# Altium PCB Callisto Control Board.PcbDoc
Units mm, origin at the board's own origin, x right, y up, seen from the top; angles counter-clockwise.
Board outline 126 x 70.5 mm, 4 copper layers (Top Layer, Layer 1, Layer 2, Bottom Layer), stack 1.767 mm thick; 72 components, 54 nets, 282 pads, 29 vias.
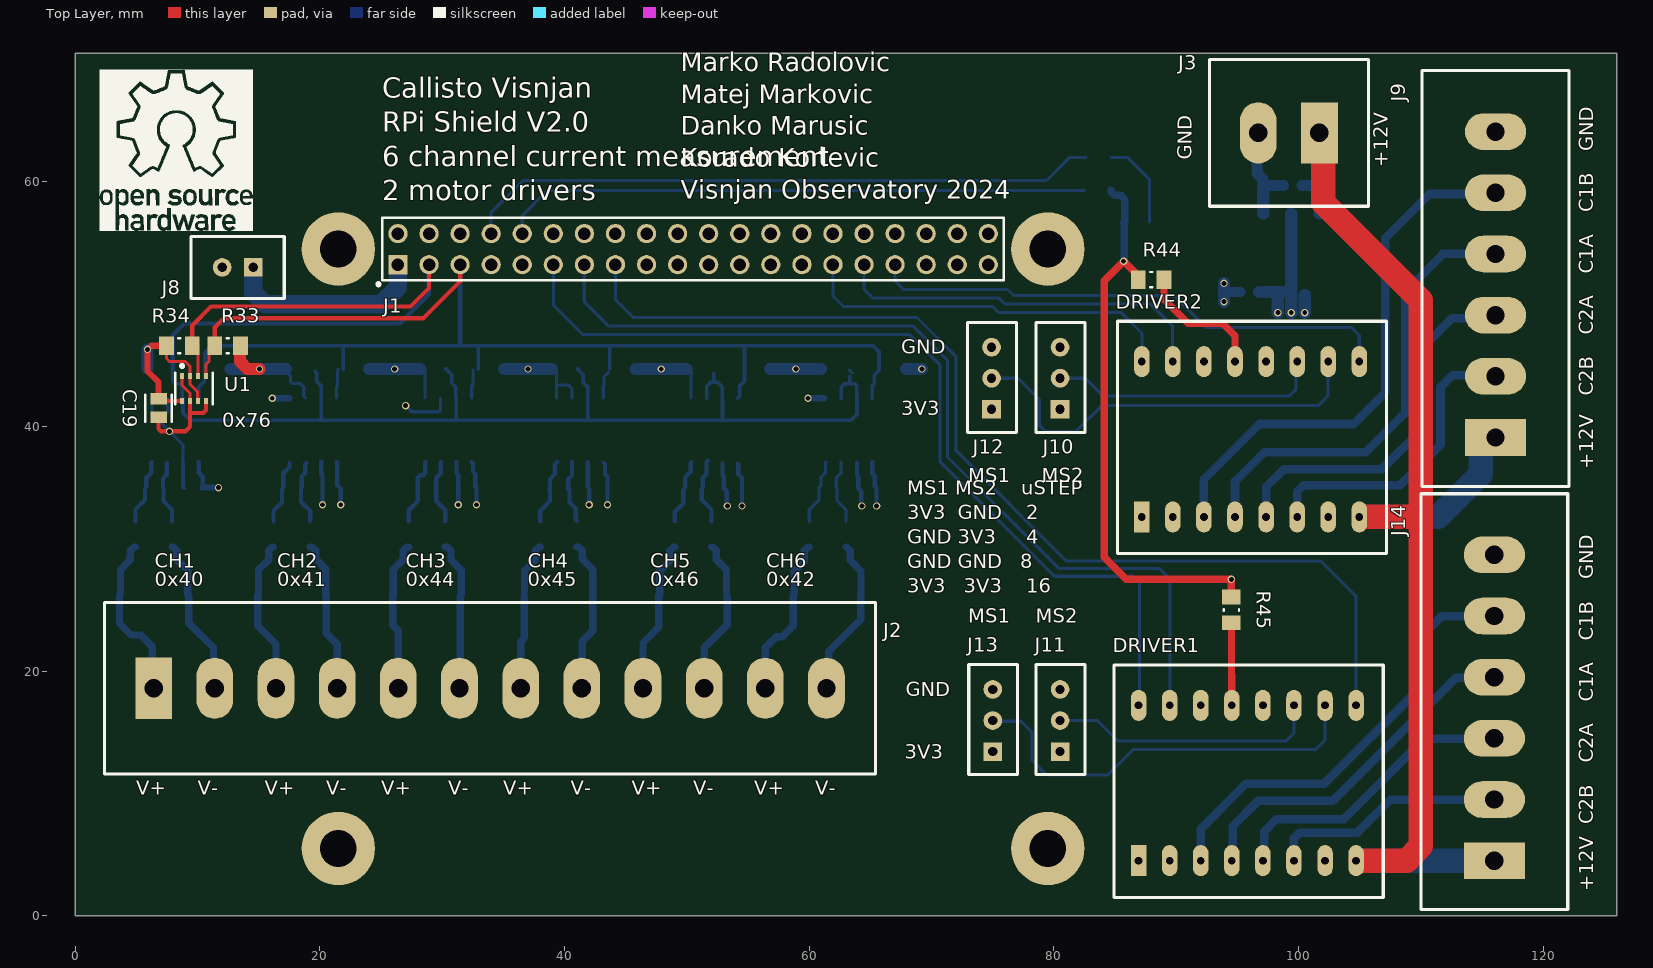
[diagram p0: Top Layer view]
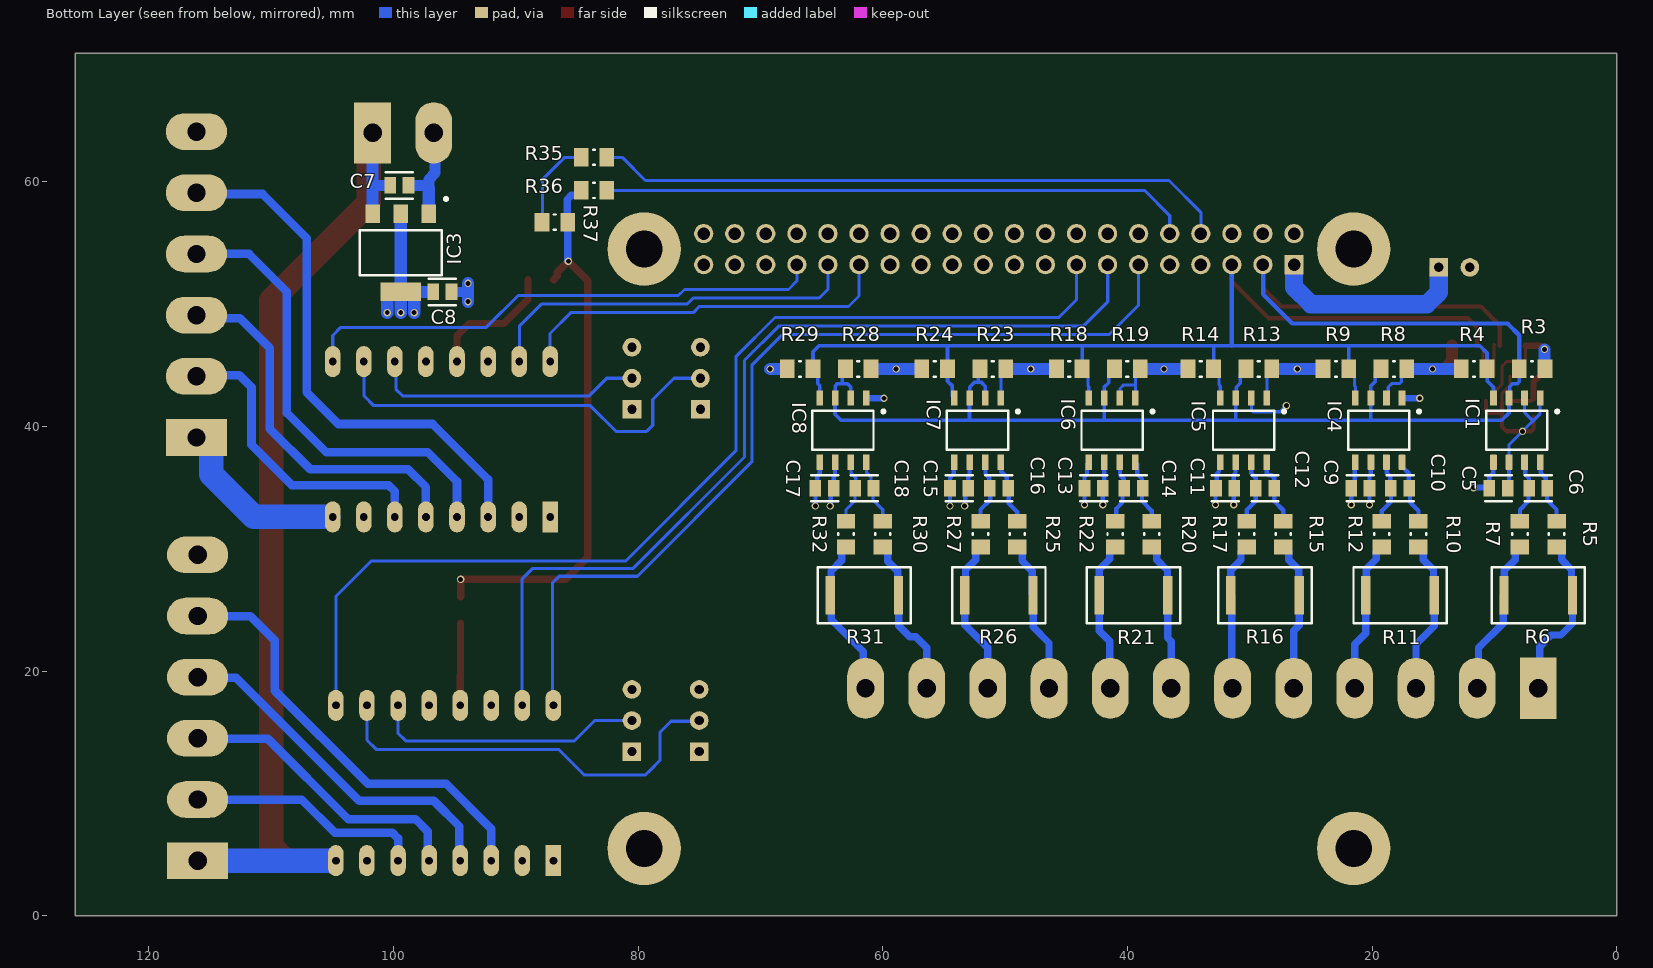
[diagram p1: Bottom Layer view, seen from below]
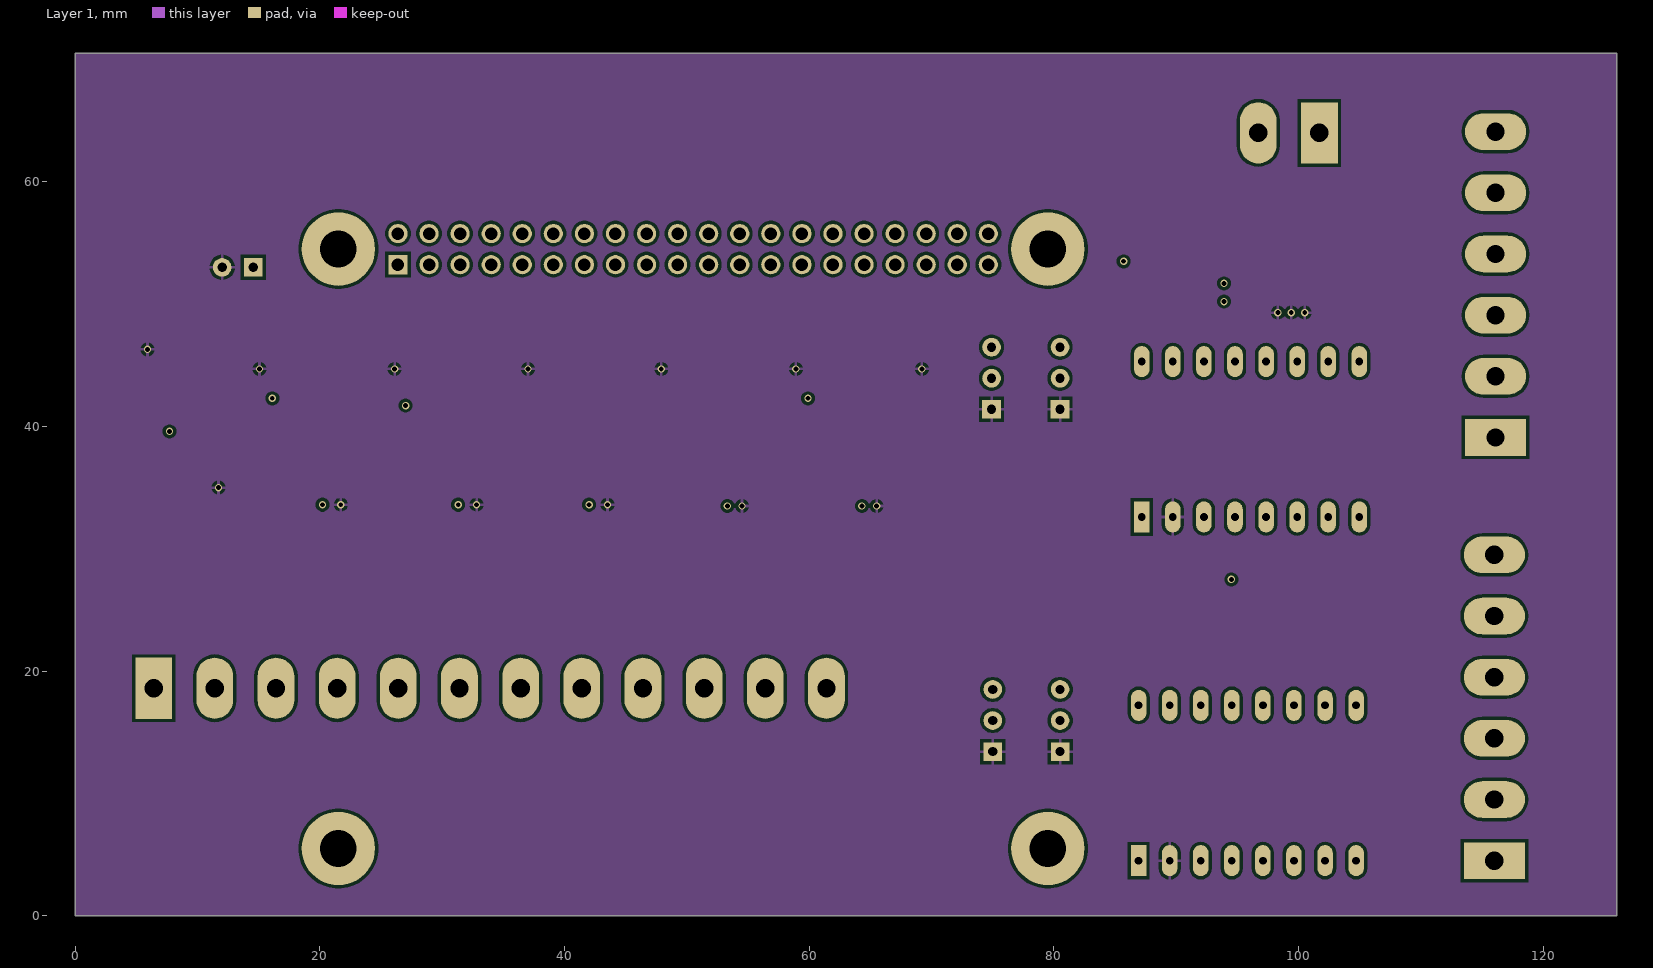
[diagram p2: Layer 1]
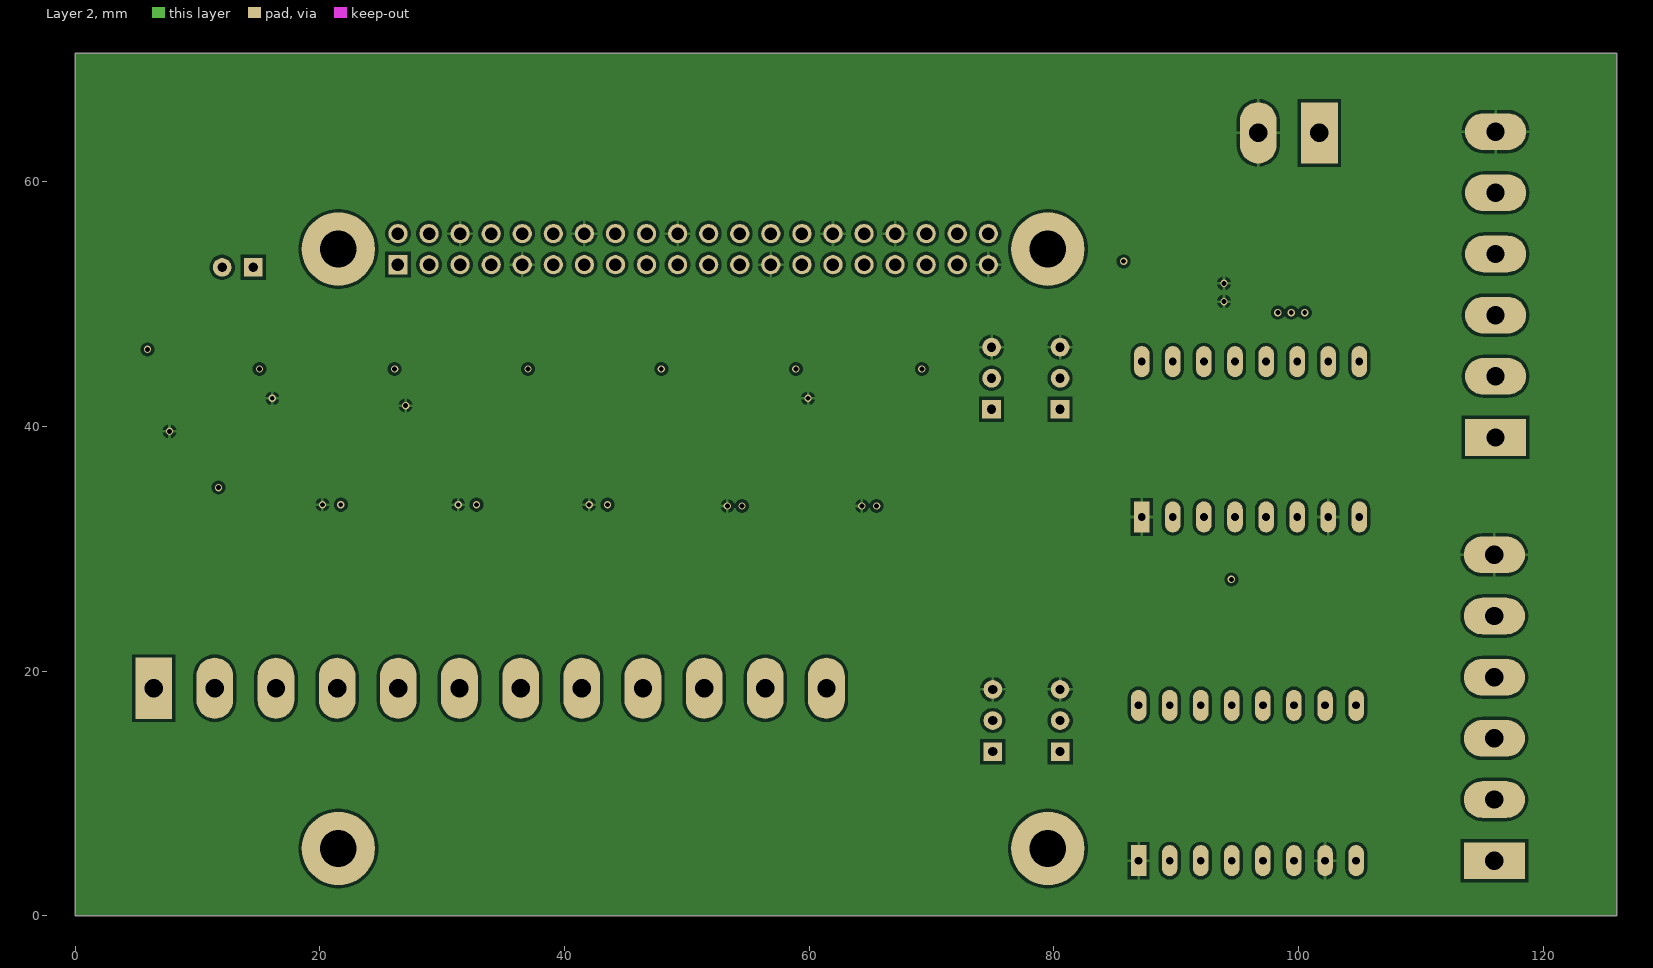
[diagram p3: Layer 2]
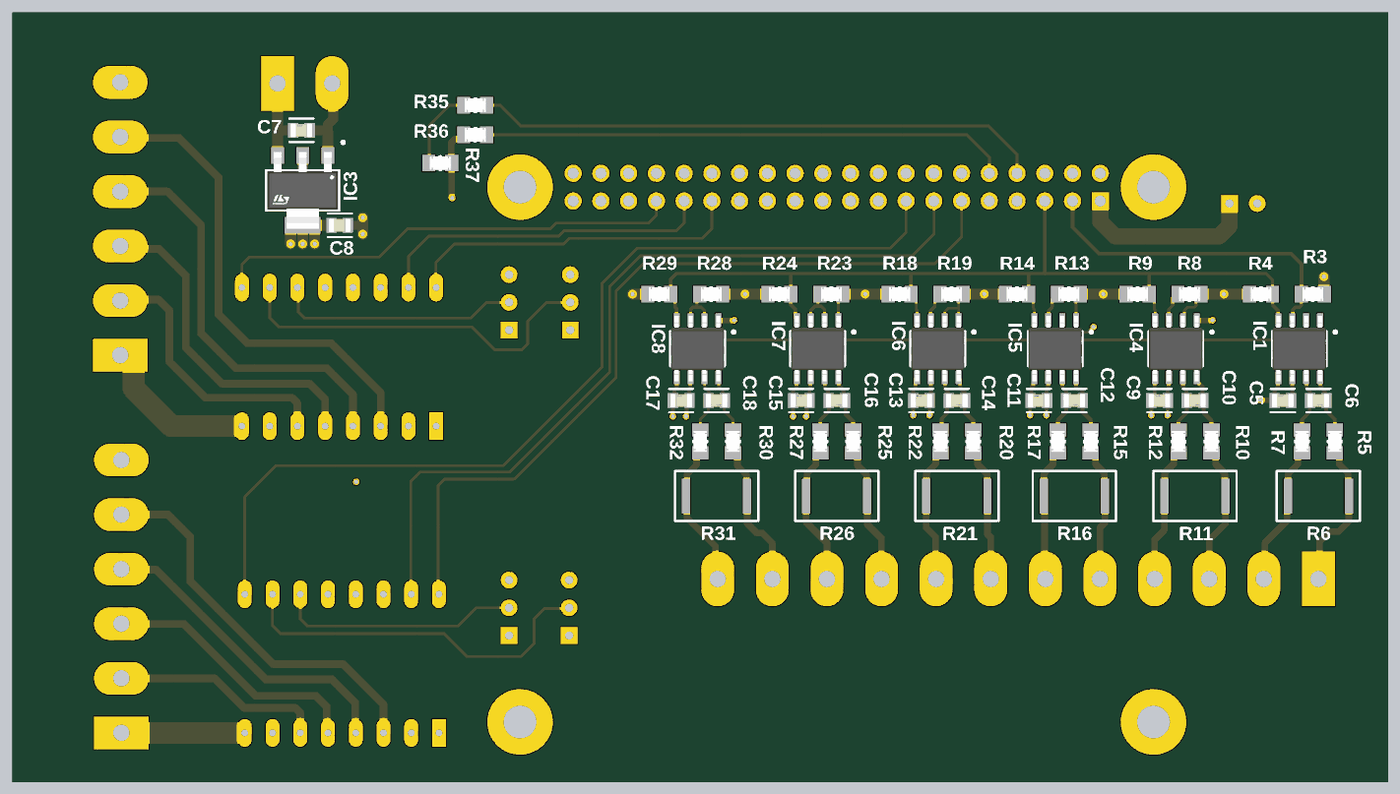
[diagram p4: 3D render of the assembled board from below, using the file's embedded part models]

## Layer stack, top to bottom
Top Solder: solder mask 0.0203, Solder Resist, Dk 3.5
Top Layer: signal copper 0.0533
Dielectric 2: prepreg 0.0711, PP-006, Dk 4.1
Layer 1: signal copper 0.035
Dielectric 1: dielectric 1.4478, FR-4, Dk 4.6
Layer 2: signal copper 0.035
Dielectric 3: prepreg 0.0711, PP-006, Dk 4.1
Bottom Layer: signal copper 0.0533
Bottom Solder: solder mask 0.0203, Solder Resist, Dk 3.5

## Board outline
0,0 0,70.5 126,70.5 126,0

## Design rules (kind name [scope] priority, off if disabled: settings)
Clearance [All] p1: gap=0.254 ignorepadtopadclearanceinfootprint=FALSE except(0: Arc-Hole Track-Hole SMDPad-Hole THPad-Hole Via-Hole Fill-Hole Poly-Hole Region-Hole Text-Hole)
HoleSize [All] p1: absolutevalues=TRUE maxlimit=4 minlimit=0.15 maxpercent=80.000 minpercent=20.000
PolygonConnect [All] p1: connectstyle=Relief reliefconductorwidth=0.254 reliefentries=4 polygonreliefangle="90 Angle" airgapwidth=0.254
RoutingVias [All] p1: holewidth=0.711 width=1.27 viastyle="Through Hole" minholewidth=0.15 minwidth=0.25 maxholewidth=5 maxwidth=6
SolderMaskExpansion [All] p1: expansion=0.102 istentingtop=FALSE
Width [All] p1: maxlimit=2 minlimit=0.254 preferedwidth=0.6
29 further rules are at their usual default settings.

## Classes and differential pairs
component class "Callisto Control Board": J2 R37
component class TMC2209: DRIVER1 DRIVER2 J9 J10 J11 J12 J13 J14 R44 R45
component class "Temperature sensor": C19 R33 R34 U1
component class "Raspberry Pi": J1 J8 R35 R36
component class INA219: C17 C18 IC8 R28 R29 R30 R31 R32
component class "3V3 Low Dropout Regulator": C7 C8 IC3 J3

## Components (designator, comment, footprint, x,y, rotation, side; value= is the part's Value field where it differs from the comment)
C5 "0.1 uF" FP-C0805C-DN-MFG 9.66,34.949 r180 bottom value="0.10 μF"
C6 "0.1 uF" FP-C0805C-DN-MFG 6.41,34.949 r0 bottom value="0.10 μF"
C7 "0.1 μF" FP-C0805C-DN-MFG 99.511,59.703 r180 bottom
C8 "10 uF" FP-C0805C-DG-MFG 96,51 r180 bottom
C9 "0.1 uF" FP-C0805C-DN-MFG 20.955,34.949 r180 bottom value="0.10 μF"
C10 "0.1 uF" FP-C0805C-DN-MFG 17.705,34.949 r0 bottom value="0.10 μF"
C11 "0.1 uF" FP-C0805C-DN-MFG 32,34.949 r180 bottom value="0.10 μF"
C12 "0.1 uF" FP-C0805C-DN-MFG 28.75,34.949 r0 bottom value="0.10 μF"
C13 "0.1 uF" FP-C0805C-DN-MFG 42.75,34.949 r180 bottom value="0.10 μF"
C14 "0.1 uF" FP-C0805C-DN-MFG 39.5,34.949 r0 bottom value="0.10 μF"
C15 "0.1 uF" FP-C0805C-DN-MFG 53.75,34.949 r180 bottom value="0.10 μF"
C16 "0.1 uF" FP-C0805C-DN-MFG 50.5,34.949 r0 bottom value="0.10 μF"
C17 "0.1 uF" FP-C0805C-DN-MFG 64.75,34.949 r180 bottom value="0.10 μF"
C18 "0.1 uF" FP-C0805C-DN-MFG 61.5,34.949 r0 bottom value="0.10 μF"
C19 "0.1 μF" FP-C0805C-DN-MFG 6.8,41.5 r270 top
DRIVER1 "TMC2209" TMC2209 86.92,4.5 r90 top
DRIVER2 "TMC2209" TMC2209 87.18,32.6 r90 top
IC1 "INA219AIDR" INA219AIDR 8.16,39.699 r270 bottom
IC3 "LD1117S33CTR" LD1117 99.4,54.2 r270 bottom
IC4 "INA219AIDR" INA219AIDR 19.455,39.699 r270 bottom
IC5 "INA219AIDR" INA219AIDR 30.5,39.699 r270 bottom
IC6 "INA219AIDR" INA219AIDR 41.25,39.699 r270 bottom
IC7 "INA219AIDR" INA219AIDR 52.25,39.699 r270 bottom
IC8 "INA219AIDR" INA219AIDR 63.25,39.699 r270 bottom
J1 "PRT-16763" FP-SFH11-PBPC-D20-ST-BK-MFG 26.375,53.225 r0 top
J2 "12 pin header" "12 PIN TERMINAL" 6.4,18.6 r0 top
J3 "2 pin" "2 PIN TERMINAL 5MM" 101.7,64 r180 top
J8 "2 pin" "2 PIN HEADER" 14.54,53 r180 top
J9 "6 pin" "6 PIN TERMINAL 5 MM" 116.1,39.1 r90 top
J10 "3 pin" "3 PIN HEADER" 80.5,41.4 r90 top
J11 "3 pin" "3 PIN HEADER" 80.5,13.42 r90 top
J12 "3 pin" "3 PIN HEADER" 74.9,41.4 r90 top
J13 "3 pin" "3 PIN HEADER" 75,13.42 r90 top
J14 "6 pin" "6 PIN TERMINAL 5 MM" 116,4.5 r90 top
R3 "3k3" "0805 RESISTOR - IPC A" 6.91,44.699 r180 bottom
R4 "3k3" "0805 RESISTOR - IPC A" 11.66,44.699 r0 bottom
R5 "10R" "0805 RESISTOR - IPC A" 4.91,31.199 r270 bottom
R6 "100 mΩ" PE2512FKM070R1L 6.41,26.199 r180 bottom
R7 "10R" "0805 RESISTOR - IPC A" 7.91,31.199 r270 bottom
R8 "3k3" "0805 RESISTOR - IPC A" 18.205,44.699 r180 bottom
R9 "3k3" "0805 RESISTOR - IPC A" 22.955,44.699 r0 bottom
R10 "10R" "0805 RESISTOR - IPC A" 16.205,31.199 r270 bottom
R11 "100 mΩ" PE2512FKM070R1L 17.705,26.199 r180 bottom
R12 "10R" "0805 RESISTOR - IPC A" 19.205,31.199 r270 bottom
R13 "3k3" "0805 RESISTOR - IPC A" 29.25,44.699 r180 bottom
R14 "3k3" "0805 RESISTOR - IPC A" 34,44.699 r0 bottom
R15 "10R" "0805 RESISTOR - IPC A" 27.25,31.199 r270 bottom
R16 "100 mΩ" PE2512FKM070R1L 28.75,26.199 r180 bottom
R17 "10R" "0805 RESISTOR - IPC A" 30.25,31.199 r270 bottom
R18 "3k3" "0805 RESISTOR - IPC A" 40,44.699 r180 bottom
R19 "3k3" "0805 RESISTOR - IPC A" 44.75,44.699 r0 bottom
R20 "10R" "0805 RESISTOR - IPC A" 38,31.199 r270 bottom
R21 "100 mΩ" PE2512FKM070R1L 39.5,26.199 r180 bottom
R22 "10R" "0805 RESISTOR - IPC A" 41,31.199 r270 bottom
R23 "3k3" "0805 RESISTOR - IPC A" 51,44.699 r180 bottom
R24 "3k3" "0805 RESISTOR - IPC A" 55.75,44.699 r0 bottom
R25 "10R" "0805 RESISTOR - IPC A" 49,31.199 r270 bottom
R26 "100 mΩ" PE2512FKM070R1L 50.5,26.199 r180 bottom
R27 "10R" "0805 RESISTOR - IPC A" 52,31.199 r270 bottom
R28 "3k3" "0805 RESISTOR - IPC A" 62,44.699 r180 bottom
R29 "3k3" "0805 RESISTOR - IPC A" 66.75,44.699 r0 bottom
R30 "10R" "0805 RESISTOR - IPC A" 60,31.199 r270 bottom
R31 "100 mΩ" PE2512FKM070R1L 61.5,26.199 r180 bottom
R32 "10R" "0805 RESISTOR - IPC A" 63,31.199 r270 bottom
R33 "4k7" "0805 RESISTOR - IPC A" 12.451,46.6 r180 top
R34 "4k7" "0805 RESISTOR - IPC A" 8.5,46.6 r0 top
R35 "0R" "0805 RESISTOR - IPC A" 83.6,62 r0 bottom
R36 "0R" "0805 RESISTOR - IPC A" 83.6,59.3 r0 bottom
R37 "1k" "0805 RESISTOR - IPC A" 86.8,56.7 r0 bottom
R44 "0R" "0805 RESISTOR - IPC A" 87.949,52 r180 top
R45 "0R" "0805 RESISTOR - IPC A" 94.5,25 r90 top
U1 "BME280" FP-BME280-MFG 9.7,43.1 r90 top

## Footprints (in the part's own frame and the unit in brackets; to place one, negate y for a bottom-side part, rotate by r counter-clockwise, add the part's x,y. Pads: shape width x height; smd on the part's side, far side on the other; paste and mask are expansions set on the pad)
"2 PIN HEADER" [mil]
  rect 60x60 hole 30: 1(0,0)
  round 60 hole 30: 2(100,0)
  silkscreen extent -100,-100 200,100
"2 PIN TERMINAL 5MM" [mm]
  rect 3x5 hole 1.5: 1(0,0)
  oval 3x5 hole 1.5: 2(5,0)
  silkscreen extent -4,-6 9,6
"3 PIN HEADER" [mil]
  rect 60x60 hole 30: 1(0,0)
  round 60 hole 30: 2(100,0) 3(200,0)
  silkscreen extent -74,-80 280,77
"6 PIN TERMINAL 5 MM" [mm] "6 pin terminal block 5 mm"
  rect 3x5 hole 1.5: 1(0,0)
  oval 3x5 hole 1.5: 2(5,0) 3(10,0) 4(15,0) 5(20,0) 6(25,0)
  silkscreen extent -4,-6 30,6
"12 PIN TERMINAL" [mm]
  rect 3x5 hole 1.5: 1(0,0)
  oval 3x5 hole 1.5: 2(5,0) 3(10,0) 4(15,0) 5(20,0) 6(25,0) 7(30,0) 8(35,0) 9(40,0) 10(45,0) 11(50,0) 12(55,0)
  silkscreen extent -4,-7 59,7
"0805 RESISTOR - IPC A" [mil]
  rect 47.5x59.38 smd paste+0: 1(-41.37,0) 2(41.37,0)
  silkscreen extent -3,-25 3,25, body extent -39,-25 39,25, height 20
FP-BME280-MFG [mm]
  rect 0.5x0.35 smd paste+0 mask+0: 1(1.025,0.975) 2(1.025,0.325) 3(1.025,-0.325) 4(1.025,-0.975) 5(-1.025,-0.975) 6(-1.025,-0.325) 7(-1.025,0.325) 8(-1.025,0.975)
  silkscreen extent -1.3,-1.55 1.97,1.55
FP-C0805C-DG-MFG [mm]
  rect 0.95x1.35 smd paste+0 mask+0: 1(-0.75,0) 2(0.75,0)
  silkscreen extent -1.11,-1.08 1.1,1.07, body extent -1,-0.63 1,0.63, height 1.4
FP-C0805C-DN-MFG [mm]
  rect 0.95x1.35 smd paste+0 mask+0: 1(-0.75,0) 2(0.75,0)
  silkscreen extent -1.1,-1.07 1.1,1.07, body extent -1,-0.63 1,0.63, height 0.88
FP-SFH11-PBPC-D20-ST-BK-MFG [mm]
  rect 1.57x1.57 hole 1.02 paste-2539.97: 1(0,0)
  round 1.57 hole 1.02 paste-2539.97: 2(0,2.54) 3(2.54,0) 4(2.54,2.54) 5(5.08,0) 6(5.08,2.54) 7(7.62,0) 8(7.62,2.54) 9(10.16,0) 10(10.16,2.54) 11(12.7,0) 12(12.7,2.54) 13(15.24,0) 14(15.24,2.54) 15(17.78,0) 16(17.78,2.54) 17(20.32,0) 18(20.32,2.54) 19(22.86,0) 20(22.86,2.54) 21(25.4,0) 22(25.4,2.54) 23(27.94,0) 24(27.94,2.54) 25(30.48,0) 26(30.48,2.54) 27(33.02,0) 28(33.02,2.54) 29(35.56,0) 30(35.56,2.54) 31(38.1,0) 32(38.1,2.54) 33(40.64,0) 34(40.64,2.54) 35(43.18,0) 36(43.18,2.54) 37(45.72,0) 38(45.72,2.54) 39(48.26,0) 40(48.26,2.54)
  silkscreen extent -1.72,-1.72 49.53,3.82
INA219AIDR [mm] "SOIC, 8-Leads, Body 5x4mm, Pitch 1.27mm, IPC High Density"
  rrect18% 1.25x0.55 smd: 1(-2.625,1.905) 2(-2.625,0.635) 3(-2.625,-0.635) 4(-2.625,-1.905) 5(2.625,-1.905) 6(2.625,-0.635) 7(2.625,0.635) 8(2.625,1.905)
  silkscreen extent -1.65,-2.5 1.6,3.43, body extent -3,-2.45 3,2.45, height 1.63
LD1117 [mm]
  rect 1.5x1.2 smd paste+0: 1(-3.2,2.3) 2(-3.2,0) 3(-3.2,-2.3)
  rect 1.5x3.3 smd paste+0: 4(3.2,0)
  silkscreen extent -4.52,-3.35 1.85,3.82, body extent -3.5,-3.25 3.5,3.25, height 1.9
PE2512FKM070R1L [mm]
  rect 0.76x3.18 smd: 1(-2.795,0) 2(2.795,0)
  silkscreen extent -3.81,-2.29 3.81,2.29
TMC2209 [mm]
  rect 2.54x1.27 hole 0.635: 1(0,0)
  oval 2.54x1.27 hole 0.635: 2(0,-2.54) 3(0,-5.08) 4(0,-7.62) 5(0,-10.16) 6(0,-12.7) 7(0,-15.24) 8(0,-17.78) 9(12.7,-17.78) 10(12.7,-15.24) 11(12.7,-12.7) 12(12.7,-10.16) 13(12.7,-7.62) 14(12.7,-5.08) 15(12.7,-2.54) 16(12.7,0)
  round 1 on Top Overlay: ""(-2,3)
  silkscreen extent -3,-20 16,2

## Part data
C5 C6 C9 C10 C11 C12 C13 C14 C15 C16 C17 C18: library part CMP-03020-002581-2, "C0805 0.10 μF X7R 30ppm/°C 20.00% 50 V C0805C104M5RAC", Capacitance="0.10 μF", Manufacturer=KEMET, Manufacturer Part Number=C0805C104M5RAC, Package=C0805C-DN, Temperature="-55°C to +125°C", Temperature Characteristic=X7R, Temperature Coefficient=30ppm/°C, Temperature Range High=+125°C, Temperature Range Low=-55°C, Tolerance=0.2, Voltage Rating="50 V", Automotive=No, Category=Cap, ComponentLink2Description=Datasheet, ComponentLink2URL=https://content.kemet.com/datasheets/KEM_C1003_C0G_SMD.pdf, Device Class L1="Passive Components", Device Class L2=Capacitors, Device Class L3="Ceramic Capacitors", Height=0.88mm, Ipc Land Pattern Name=CAPC200125X78, Lead Free=Yes, Material=Ceramic, Mouser Description="Multilayer Ceramic Capacitors MLCC - SMD/SMT 50volts 0.1uF 20% X7R", Octopart=https://octopart.com/c0805c104m5rac-kemet-2226142, RoHS=TRUE
C7 C19: library part CMP-03020-002581-2, "C0805 0.10 μF X7R 30ppm/°C 20.00% 50 V C0805C104M5RAC", Manufacturer=KEMET, Manufacturer Part Number=C0805C104M5RAC, Package=C0805C-DN, Temperature="-55°C to +125°C", Temperature Characteristic=X7R, Temperature Coefficient=30ppm/°C, Temperature Range High=+125°C, Temperature Range Low=-55°C, Tolerance=0.2, Voltage Rating="50 V", Automotive=No, Capacitance="0.1 μF", Category=Cap, ComponentLink2Description=Datasheet, ComponentLink2URL=https://content.kemet.com/datasheets/KEM_C1003_C0G_SMD.pdf, Device Class L1="Passive Components", Device Class L2=Capacitors, Device Class L3="Ceramic Capacitors", Height=0.88mm, Ipc Land Pattern Name=CAPC200125X78, Lead Free=Yes, Material=Ceramic, Mouser Description="Multilayer Ceramic Capacitors MLCC - SMD/SMT 50volts 0.1uF 20% X7R", Octopart=https://octopart.com/c0805c104m5rac-kemet-2226142, RoHS=TRUE
C8: library part CMP-2007-03243-2, "CAP CER 10UF 10V X5R 0805 / C0805C106K8PACTU", 3DS Part Number=220-00001, Manufacturer=Kemet, Manufacturer Part Number=C0805C106K8PACTU, Package=C0805C-DG, Temperature="-55°C to +85°C", Temperature Characteristic=X5R, Temperature Coefficient=15%, Temperature Range High=+85°C, Temperature Range Low=-55°C, Tolerance=10%, Voltage=10V, Automotive=No, Capacitance="10 uF", Category=Cap, ComponentLink2Description=Datasheet, ComponentLink2URL=https://content.kemet.com/datasheets/KEM_C1006_X5R_SMD.pdf, Device Class L1="Passive Components", Device Class L2=Capacitors, Device Class L3="Ceramic Capacitors", Digikey Description="CAP CER 10UF 10V X5R 0805", Height=1.4mm, Ipc Land Pattern Name=CAPC200125X125, Lead Free=Yes, Material=Ceramic, Mouser Description="CAP CER 10UF 10V X5R 0805", Octopart=https://octopart.com/c0805c106k8pactu-kemet-98697, RoHS=TRUE, Voltage Rating=10V
DRIVER1 DRIVER2: "TMC2209 FET based stepper motor driver board"
IC1 IC4 IC5 IC6 IC7 IC8: "Current & Power Monitors & Regulators Zero-Drift,Bi-Dir Crnt/Pwr Monitor"
IC3: "IC REG LINEAR 3.3V 800MA SOT223"
J1: library part "Raspberry Pi 3+ Header", "Headers & Wire Housings Extended GPIO Female Header - 2x20 Pin (16mm/7.30mm)"
J2: library part "12 pin terminal"
J3: library part "2 pin terminal block 5 mm"
J8: library part "2 pin male header 0.254mm"
J9 J14: library part "6 pin terminal block 5 mm"
J10 J11 J12 J13: library part "3 pin male header 0.254mm"
R3 R4 R8 R9 R13 R14 R18 R19 R23 R24 R28 R29: library part RE0805FRE073K3L, "Thick Film Resistors - SMD 3.3 kOhms 125 mW 0805 1% / RE0805FRE073K3L"
R5 R7 R10 R12 R15 R17 R20 R22 R25 R27 R30 R32: library part RC0805FR-0710RL, "Thick Film Resistors - SMD 10 Ohms 125 mW 0805 1% / RC0805FR-0710RL"
R6 R11 R16 R21 R26 R31: library part PE2512FKM070R1L, "Current Sense Resistors - SMD 100 mOhms 1 Watt 1 % 75 ppm/C AEC-Q200 / PE2512FKM070R1L"
R33 R34: library part RC0805FR-104K7L, "Thick Film Resistors - SMD 4.7 kOhms 250 mW 0805 1% / RC0805FR-104K7L"
R35 R36 R44 R45: library part RC0805JR-070RL, "Thick Film Resistors - SMD 0 Ohms 125 mW 0805 5% / RC0805JR-070RL"
R37: library part RC0805FR-071KL, "Thick Film Resistors - SMD 1 kOhms 125 mW 0805 1% / RC0805FR-071KL", Part Number=RC0805FR-071KL
U1: library part CMP-2000-05073-3, "SENSOR PRESSURE HUMIDITY TEMP", Case/Package=LGA, Max Operating Temperature=85°C, Min Operating Temperature=-40°C, Accuracy=3%, Lead Free="Lead Free", Mount="Surface Mount", Number of Pins=8, Output Type=SPI, Packaging="Cut Tape", Response Time=1s, Sensor Type=Temperature

## Free pads (board coordinates)
  round 6 hole 3: 8(21.5,5.5) 8(21.5,54.5) 8(79.5,5.5) 8(79.5,54.5)

## Via types
v1: diameter 0.6, hole 0.4, Top Layer to Bottom Layer, 29 vias

## Nets (pads, with @x,y where several pads share a name; then routed paths per layer and width w, separated by ;. In a path a pad name is that pad's centre, name@x,y a point inside that pad or via, vN(x,y) a via of type N, cw(c..) or ccw(c..) an arc to the next point about the centre after c; other vN are vias at no path point)
+3V3_LDO: C5.1 C8.1 C9.1 C11.1 C13.1 C15.1 C17.1 C19.1 DRIVER1.2 DRIVER2.2 IC1.5 IC3.2 IC3.4 IC4.2 IC4.5 IC5.1 IC5.5 IC6.1 IC6.2 IC6.5 IC7.1 IC7.5 IC8.5 J8.2 J10.1 J11.1 J12.1 J13.1 R3.2 R4.2 R8.2 R9.2 R13.2 R14.2 R18.2 R19.2 R23.2 R24.2 R28.2 R29.2 R33.1 R34.1 U1.2 U1.6 U1.8 | length 88.9
  Top Layer w0.254: C19.1 6.975,42.075 7.125,42.075 C19.1@7.1,42.1 ; R34.1 7.449,45.551 7.7,45.3 9,45.3 9.375,44.925 U1.2 9.375,43.443 10,42.818 U1.6@10,42.1 ; U1.8@8.677,42.075 8.7,42.098 U1.8@8.7,42.1
  Top Layer w0.35: C19.1@7.125,42.075 U1.8@8.677,42.075
  Top Layer w0.5: C19.1@6.8,42.3 6.8,43.6 5.9,44.5 v1(5.9,46.3) 5.927,46.3 6.227,46.6 R34.1
  Top Layer w1: R33.1@13.451,46.6 13.451,45.3 14.051,44.7 v1(15.051,44.7)
  Bottom Layer w0.254: R3.2 R3.2@5.9,44.74 ; C5.1@10.4,35 C5.1@10.41,35 ; R8.2@17.2,44.7 17.2,44.502 17.6,44.102 17.6,43.649 17.749,43.5 18.4,43.5 18.672,43.228 18.672,42.472 IC4.2 ; IC5.1 28.595,44.595 R13.2@28.6,44.6 ; R18.2 R18.2@38.999,44.699 ; R18.2@39.2,44.6 39.345,44.455 39.345,43.4 ; IC6.1 39.345,43.4 ; IC6.2 40.6,42.339 40.6,43.1 40.3,43.4 39.345,43.4 ; IC6.5 IC6.5@43.303,36.926 ; R23.2 R23.2@49.999,44.699 ; IC7.1 50.345,44.345 R23.2@50.4,44.4 ; IC7.5@54.1,37 IC7.5@54.2,36.9 ; R28.2 R28.2@60.999,44.699
  Bottom Layer w0.35: IC1.5@10.1,37.1 10.1,36.2 10.41,35.89 C5.1@10.41,35 ; IC4.5@21.38,37.094 IC4.5 21.4,37.034 21.4,35.2 C9.1@21.6,35 ; v1(21.7,33.6) 21.703,33.602 21.703,34.897 C9.1@21.7,34.9 ; IC5.5 32.505,36.974 32.505,36.295 32.7,36.1 C11.1@32.7,35 ; v1(32.8,33.6) C11.1@32.8,35 ; IC6.5@43.303,36.926 43.303,36.097 43.5,35.9 C13.1@43.5,35 ; v1(43.5,33.6) C13.1@43.5,34.9 ; IC7.5@54.2,36.9 54.2,36.1 54.5,35.8 C15.1 ; v1(54.5,33.5) C15.1@54.5,34.9 ; IC8.5 65.147,37.066 65.147,36.153 65.356,35.944 65.356,35.093 C17.1 ; v1(65.5,33.5) C17.1@65.5,34.9
  Bottom Layer w0.5: C5.1@10.41,35 v1(11.7,35)
  Bottom Layer w1: R3.2@5.9,44.74 v1(5.9,46.3) ; R4.2 R8.2@17.2,44.7 ; R9.2 R13.2 ; R14.2 R18.2 ; R19.2 R23.2 ; R24.2 R28.2 ; R29.2@67.9,44.7 v1(69.2,44.7) ; C8.1@96.775,51 IC3.4 IC3.2 ; v1(98.3,49.3) IC3.4@98.3,50.9 ; v1(99.4,49.3) IC3.4@99.4,50.9 ; v1(100.5,49.3) IC3.4@100.5,50.75
  other v1: 26.1,44.7 37,44.7 47.9,44.7 58.9,44.7
+12V_SW: C7.1 DRIVER1.8 DRIVER2.8 IC3.3 J3.1 J9.1 J14.1 | length 105.7
  Top Layer w0.254: J9.1@116,39 J9.1
  Top Layer w2: J3.1 102,63.7 102,58.3 110,50.3 110,32.6 110,5.672 108.828,4.5 DRIVER1.8@105.065,4.5 ; 105.6,32.6 109.8,32.6 ; J14.1 J14.1@116.25,4.5
  Bottom Layer w0.9: C7.1 101.7,59.703
  Bottom Layer w1: IC3.3 101.7,59.703 J3.1
  Bottom Layer w2: DRIVER1.8@105.1,4.5 J14.1 ; DRIVER2.8@105.325,32.6 111.4,32.6 114.879,36.079 114.879,38.6 115.379,39.1 J9.1
C1A_CH1: DRIVER2.4 J9.4 | length 37.7
  Bottom Layer w0.7: DRIVER2.4 94.8,35.5 97.2,37.9 105.5,37.9 108.7,41.1 108.7,51 111.8,54.1 J9.4
C1A_CH2: DRIVER1.4 J14.4 | length 29.3
  Bottom Layer w0.7: DRIVER1.4 94.6,4.56 94.6,7.3 96.7,9.4 102.8,9.4 112.86,19.46 115.96,19.46 J14.4
C1B_CH1: DRIVER2.3 J9.5 | length 43.8
  Bottom Layer w0.7: DRIVER2.3 92.26,35.66 96.8,40.2 104.5,40.2 107.1,42.8 107.1,55.4 110.7,59 J9.5@116,59
C1B_CH2: DRIVER1.3 J14.5 | length 36.3
  Bottom Layer w0.7: DRIVER1.3 92,7.1 95.7,10.8 102.1,10.8 109.7,18.4 109.7,22.5 111.7,24.5 J14.5 J14.5@116.1,24.5
C2A_CH1: DRIVER2.5 J9.3 | length 30.7
  Bottom Layer w0.7: DRIVER2.5 97.34,35.04 98.8,36.5 106.8,36.5 110.1,39.8 110.1,46.4 112.55,48.85 115.85,48.85 J9.3@116,49
C2A_CH2: DRIVER1.5 J14.3 | length 22.3
  Bottom Layer w0.7: DRIVER1.5 97.2,4.62 97.2,6.9 98.2,7.9 103.7,7.9 110.268,14.468 113.732,14.468 113.85,14.586 J14.3@113.886,14.586
C2B_CH1: DRIVER2.6 J9.2 | length 25
  Bottom Layer w0.7: DRIVER2.6 99.88,34.68 100.4,35.2 108.3,35.2 111.6,38.5 111.6,43.2 112.6,44.2 J9.2@116.1,44.2
C2B_CH2: DRIVER1.6 J14.2 | length 19.5
  Bottom Layer w0.7: DRIVER1.6 99.62,6.32 100.1,6.8 104.8,6.8 107.5,9.5 J14.2
GND: C5.2 C7.2 C8.2 C9.2 C11.2 C13.2 C15.2 C17.2 C19.2 DRIVER1.1 DRIVER1.7 DRIVER2.1 DRIVER2.7 IC1.1 IC1.2 IC1.6 IC3.1 IC4.1 IC4.6 IC5.2 IC5.6 IC6.6 IC7.6 IC8.1 IC8.6 J1.6 J1.9 J1.14 J1.20 J1.25 J1.30 J1.34 J1.39 J3.2 J9.6 J10.3 J11.3 J12.3 J13.3 J14.6 U1.1 U1.5 U1.7 | length 57.1
  Top Layer w0.254: C19.2 C19.2@6.8,40.8 ; U1.1 8.725,43.375 9.375,42.725 U1.7 9.375,42.025 9.4,42 U1.7@9.375,41.975
  Top Layer w0.35: C19.2 6.8,39.8 7,39.6 9,39.6 9.375,39.975 U1.7@9.375,41.975 ; 9.4,41.1 10.45,41.1 10.675,41.325 U1.5
  Bottom Layer w0.254: IC1.1 6.255,41.045 v1(7.7,39.6) 8.798,38.502 8.798,37.077 IC1.6 ; 6.9,40.5 7.525,41.125 IC1.2 ; C5.2@8.795,35.064 C5.2 ; v1(27,41.7) 27.5,41.2 29.716,41.2 29.865,41.349 IC5.2 ; C13.2@41.885,35.015 C13.2@41.9,35 ; IC8.6 IC8.6@63.9,37.059
  Bottom Layer w0.35: C5.2@8.795,35.064 IC1.6 ; IC4.6@20.095,37.105 IC4.6@20.1,37.1 ; IC4.6@20.1,37 20.1,36.1 20.205,35.995 C9.2 ; v1(20.2,33.6) 20.202,33.602 20.202,34.897 C9.2@20.2,34.9 ; IC5.6 31.151,37.058 31.151,36.177 31.3,36.028 C11.2@31.3,35.1 ; C11.2 31.3,34.899 v1(31.3,33.6) ; C13.2@41.885,35.015 IC6.6 ; v1(42,33.6) C13.2@42,34.9 ; IC7.6@52.9,37 52.9,36 53,35.9 C15.2 53.252,34.697 53.252,33.548 v1(53.3,33.5) ; IC8.6@63.9,37.059 63.9,36 64,35.9 C17.2 64.252,34.697 64.252,33.548 v1(64.3,33.5)
  Bottom Layer w0.5: v1(16.1,42.3) IC4.1@17.5,42.3 ; v1(59.9,42.3) IC8.1@61.2,42.3
  Bottom Layer w0.8: 93.9,51 C8.2
  Bottom Layer w0.9: J3.2@96.6,64 96.6,60.7 97.1,60.2 97.1,59.303 97.1,59.1 ; 97.1,59.703 C7.2
  Bottom Layer w1: v1(93.9,50.2) 93.9,51 v1(93.9,51.7) ; IC3.1 97.1,59.5
GPIO_0: DRIVER1.16 J1.11 | length 75.3
  Bottom Layer w0.254: J1.11 39.075,49.925 41.5,47.5 68.2,47.5 70.7,45 70.7,37.1 80.05,27.75 86.45,27.75 87,27.2 87,17.3 DRIVER1.16@86.9,17.2
GPIO_2: DRIVER1.15 J1.13 | length 75.1
  Bottom Layer w0.254: J1.13@41.6,53.1 41.6,50.2 43.6,48.2 68.5,48.2 71.3,45.4 71.3,37.5 80.4,28.4 88.6,28.4 89.5,27.5 DRIVER1.15@89.5,17.2
GPIO_3: DRIVER1.9 J1.15 | length 86.8
  Bottom Layer w0.254: J1.15@44.2,53.2 44.155,53.155 44.155,50.345 45.6,48.9 68.8,48.9 72,45.7 72,38 81.006,28.994 101.806,28.994 104.7,26.1 DRIVER1.9@104.7,17.266
GPIO_21: DRIVER2.16 J1.29 | length 31.4
  Bottom Layer w0.254: J1.29 61.935,50.665 62.8,49.8 75,49.8 75.5,49.3 85.5,49.3 87.2,47.6 DRIVER2.16@87.2,45.3
GPIO_22: DRIVER2.15 J1.31 | length 31.4
  Bottom Layer w0.254: J1.31 64.475,51.225 65.2,50.5 75.5,50.5 76,50 87.9,50 89.7,48.2 DRIVER2.15@89.7,45.3
GPIO_23: DRIVER2.9 J1.33 | length 43.2
  Bottom Layer w0.254: J1.33 67.015,51.885 67.7,51.2 76.2,51.2 76.7,50.7 89.8,50.7 92.4,48.1 104.3,48.1 104.9,47.5 ; 104.96,47.44 104.96,45.34 DRIVER2.9@105,45.3
NetC6_1: C6.1 IC1.8 R5.1 | length 5.2
  Bottom Layer w0.35: R5.1 4.91,33.21 5.7,34 C6.1@5.7,34.9 ; C6.1@5.8,35.089 5.8,35.8 6.217,36.217 6.217,37.036 IC1.8
NetC6_2: C6.2 IC1.7 R7.1 | length 5.2
  Bottom Layer w0.35: C6.2@7.16,35 7.16,35.751 7.477,36.068 7.477,36.977 IC1.7@7.5,37 ; C6.2@7.2,35 7.2,33.9 7.91,33.19 R7.1
NetC10_1: C10.1 IC4.8 R10.1 | length 5.3
  Bottom Layer w0.35: R10.1 16.205,33.105 16.9,33.8 16.9,34.9 17,35 17,36.174 17.5,36.674 IC4.8@17.5,37
NetC10_2: C10.2 IC4.7 R12.1 | length 5.2
  Bottom Layer w0.35: IC4.7@18.9,37 18.8,36.9 18.8,36.2 18.5,35.9 18.5,34.994 C10.2 18.455,33.845 19.2,33.1 R12.1@19.2,32.3
NetC12_1: C12.1 IC5.8 R15.1 | length 5.5
  Bottom Layer w0.35: R15.1 27.25,33.15 28,33.9 C12.1 28,35.8 28.2,36 28.4,36 28.6,36.2 IC5.8@28.6,37.1
NetC12_2: C12.2 IC5.7 R17.1 | length 5.2
  Bottom Layer w0.35: C12.2@29.5,34.9 29.5,33.9 30.25,33.15 R17.1 ; C12.2 29.5,35.8 29.865,36.165 IC5.7
NetC14_1: C14.1 IC6.8 R20.1 | length 5.4
  Bottom Layer w0.35: R20.1 38,33.1 38.8,33.9 C14.1@38.8,34.9 ; C14.1 38.8,34.999 38.8,35.7 39.2,36.1 39.2,36.9 IC6.8@39.4,37.1
NetC14_2: C14.2 IC6.7 R22.1 | length 5.3
  Bottom Layer w0.35: IC6.7@40.6,37.1 40.6,36 40.3,35.7 40.3,34.999 C14.2 40.4,34.799 40.4,33.8 40.9,33.3 40.9,32.4 R22.1@41,32.3
NetC16_1: C16.1 IC7.8 R25.1 | length 5.1
  Bottom Layer w0.35: R25.1 49,33 49.7,33.7 C16.1@49.7,34.8 ; C16.1@49.8,35 49.856,35.056 49.856,35.856 50.3,36.3 50.3,37.029 IC7.8
NetC16_2: C16.2 IC7.7 R27.1 | length 5.4
  Bottom Layer w0.35: C16.2@51.2,34.9 51.2,34 52,33.2 R27.1 ; C16.2 51.3,34.999 51.3,35.8 51.6,36.1 51.6,37.1 IC7.7@51.7,37.2
NetC18_1: C18.1 IC8.8 R30.1 | length 5.4
  Bottom Layer w0.254: R30.1 60,33.2 60.8,34 C18.1@60.8,34.9 ; C18.1 60.956,35.155 60.956,35.856 61.317,36.217 61.317,37.046 IC8.8
NetC18_2: C18.2 IC8.7 R32.1 | length 5.3
  Bottom Layer w0.254: IC8.7@62.6,37.1 62.6,36.2 62.2,35.8 62.2,34.999 C18.2 62.25,33.95 63,33.2 R32.1
NetDRIVER1_10: DRIVER1.10 J13.2 | length 34.4
  Bottom Layer w0.254: J13.2 75.06,15.9 77.3,15.9 78.2,15 78.2,12.7 79,11.9 79.4,11.5 84.4,11.5 86.5,13.6 101.4,13.6 102.16,14.36 102.16,17.16 DRIVER1.10@102.2,17.2
NetDRIVER1_11: DRIVER1.11 J11.2 | length 22.3
  Bottom Layer w0.254: J11.2 83.54,15.96 85.2,14.3 99,14.3 99.62,14.92 DRIVER1.11
NetDRIVER1_13: DRIVER1.13 R45.1 | length 9.2
  Top Layer w0.6: DRIVER1.13@94.5,17.2 94.54,17.24 94.54,19.66 ; DRIVER1.13@94.52,17.28 R45.1@94.52,23.929
  Bottom Layer w0.6: DRIVER1.13@94.52,17.28 DRIVER1.13@94.6,17.2
NetDRIVER2_10: DRIVER2.10 J12.2 | length 34.4
  Bottom Layer w0.254: J12.2 77.06,43.94 78.8,42.2 78.8,40.1 79.3,39.6 81.8,39.6 83.9,41.7 101.6,41.7 102.4,42.5 DRIVER2.10@102.4,45.2
NetDRIVER2_11: DRIVER2.11 J10.2 | length 22.1
  Bottom Layer w0.254: J10.2 82.56,43.94 84,42.5 99.25,42.5 99.8,43.05 DRIVER2.11@99.8,45.05
NetDRIVER2_13: DRIVER2.13 R44.1 | length 10.7
  Top Layer w0.6: R44.1 89,50.4 90.986,48.414 93.786,48.414 94.8,47.4 DRIVER2.13
NetJ1_1: J1.1 J8.1 | length 16.3
  Bottom Layer w1.5: J8.1 14.54,50.96 15.5,50 25,50 26.375,51.375 J1.1@26.375,52.875
NetJ2_1: J2.1 R5.2 R6.2 | length 13.4
  Bottom Layer w0.6: R6.2 3.615,23.885 4.545,22.955 5.345,22.955 6.3,22 J2.1@6.3,18.7 ; R6.2@3.695,26.38 3.695,28.295 4.5,29.1 4.5,29.845 4.803,30.148 R5.2
NetJ2_2: J2.2 R6.1 R7.2 | length 12.8
  Bottom Layer w0.6: R7.2 7.993,30.148 8.296,29.845 8.296,29.104 9.182,28.218 R6.1@9.182,26.223 ; R6.1 9.285,26.119 9.285,23.915 11.3,21.9 J2.2@11.3,18.8
NetJ2_3: J2.3 R10.2 R11.2 | length 12.9
  Bottom Layer w0.6: R10.2 16.103,30.148 15.8,29.845 15.8,29.1 14.976,28.276 14.976,26.265 R11.2 14.91,23.69 16.4,22.2 J2.3 J2.3@16.5,18.5
NetJ2_4: J2.4 R11.1 R12.2 | length 12.6
  Bottom Layer w0.6: R12.2 19.34,30.148 19.643,29.845 19.643,29.157 20.479,28.321 20.479,26.22 R11.1 20.5,23.1 21.4,22.2 J2.4@21.4,18.5
NetJ2_5: J2.5 R15.2 R16.2 | length 13
  Bottom Layer w0.35: R15.2@26.7,29.72 26.98,30 R15.2@27.3,30
  Bottom Layer w0.6: J2.5@26.4,18.7 26.4,23.3 25.955,23.745 R16.2 25.998,26.243 25.998,28.298 26.8,29.1 26.8,29.845 27.103,30.148 R15.2
NetJ2_6: J2.6 R16.1 R17.2 | length 12.2
  Bottom Layer w0.6: R17.2 30.401,30.148 30.704,29.845 30.704,29.096 31.545,28.255 R16.1 31.473,26.127 31.473,18.627 J2.6@31.5,18.6
NetJ2_7: J2.7 R20.2 R21.2 | length 12.6
  Bottom Layer w0.35: R20.2@37.5,29.72 37.6,29.82 37.88,30.1 R20.2@38.1,30.1
  Bottom Layer w0.6: J2.7 36.4,22.4 36.7,22.7 R21.2@36.7,26.1 ; R21.2@36.723,26.518 36.723,28.223 37.6,29.1 37.6,29.82 37.6,29.845 37.903,30.148 R20.2
NetJ2_8: J2.8 R21.1 R22.2 | length 12.5
  Bottom Layer w0.6: R22.2 41.138,30.148 41.441,29.845 41.441,29.159 42.295,28.305 R21.1@42.295,26.3 ; J2.8 41.449,18.649 41.449,22.449 42.3,23.3 R21.1@42.3,26.3
NetJ2_9: J2.9 R25.2 R26.2 | length 12.4
  Bottom Layer w0.6: J2.9@46.4,18.9 46.4,22.3 47.705,23.605 R26.2 47.773,26.268 47.773,28.173 48.6,29 48.6,29.845 48.903,30.148 R25.2
NetJ2_10: J2.10 R26.1 R27.2 | length 12.5
  Bottom Layer w0.6: J2.10 51.4,21.9 53.3,23.8 R26.1@53.3,26 ; R27.2 52.097,30.148 52.4,29.845 52.4,29.1 53.227,28.273 R26.1@53.227,26.364
NetJ2_11: J2.11 R30.2 R31.2 | length 13.4
  Bottom Layer w0.6: J2.11 56.4,21.9 57.3,22.8 57.8,22.8 58.7,23.7 R31.2@58.7,26.2 ; R31.2 58.778,26.273 58.778,28.168 59.6,28.99 59.6,29.845 59.903,30.148 R30.2
NetJ2_12: J2.12 R31.1 R32.2 | length 13.2
  Bottom Layer w0.6: J2.12 61.597,18.797 61.597,21.597 64.215,24.215 64.215,26.252 64.227,26.263 64.227,28.173 63.341,29.059 63.341,29.845 63.038,30.148 R32.2
NetR35_2: R35.2 R37.2 | length 7.4
  Bottom Layer w0.254: R35.2 86,62 87.8,60.2 R37.2@87.8,56.7
NetR36_2: R36.2 R37.1 R44.2 R45.2 | length 46.1
  Top Layer w0.6: R44.2 86.595,52.303 86.595,52.605 v1(85.7,53.5) 84.1,51.9 84.1,29.3 85.9,27.5 v1(94.5,27.5) R45.2
  Bottom Layer w0.6: R36.2 84.651,59.203 84.954,58.9 85.449,58.9 85.8,58.549 R37.1@85.8,56.8 ; v1(85.7,53.5) 85.749,53.549 R37.1 ; R37.1@85.7,56.6 R37.1@85.8,56.7
SCL: IC1.4 IC4.4 IC5.4 IC6.4 IC7.4 IC8.4 J1.5 R4.1 R9.1 R14.1 R19.1 R24.1 R29.1 R33.2 U1.4 | length 114
  Top Layer w0.254: U1.4 10.675,45.075 10.924,45.324 10.924,46.424 R33.2@11,46.5 ; U1.4@10.684,44.116 U1.4@10.7,44.1
  Top Layer w0.35: R33.2 11.4,48.1 12.155,48.855 28.455,48.855 31.455,51.855 31.455,53.145 J1.5@31.4,53.2
  Bottom Layer w0.254: IC4.4 21.36,43.26 21.428,43.328 21.428,44.628 R9.1@21.5,44.7 ; IC5.4 32.405,43.305 32.5,43.4 R14.1@32.5,44.6 ; IC6.4 43.155,43.255 43.223,43.323 43.223,44.072 43.551,44.4 R19.1@43.6,44.4
  Bottom Layer w0.3: IC1.4@10.05,42.3 10.075,42.325 10.075,43.2 10.588,43.713 R4.1@10.588,44.678 ; R4.1@10.6,44.7 10.6,46 11.191,46.591 21.904,46.591 ; R9.1 21.904,46.591 ; 32.9,46.591 31.455,46.591 21.904,46.591 ; 32.909,46.591 43.699,46.591 ; R14.1 32.949,46.551 ; R19.1 43.699,46.591 ; IC7.4 54.303,42.472 54.303,43.303 54.7,43.7 R24.1@54.7,44.5 ; R24.1 54.699,46.591 ; IC8.4 65.155,43.355 65.3,43.5 65.3,44.2 R29.1@65.7,44.6 ; R29.1 65.699,46.099 65.207,46.591 54.699,46.591 ; 43.699,46.591 54.699,46.591
  Bottom Layer w0.35: 31.455,46.591 J1.5
SDA: IC1.3 IC4.3 IC5.3 IC6.3 IC7.2 IC7.3 IC8.2 IC8.3 J1.3 R3.1 R8.1 R13.1 R18.1 R23.1 R28.1 R34.2 U1.3 | length 138.3
  Top Layer w0.254: R34.2@10,46.7 10.025,46.675 U1.3
  Top Layer w0.35: R34.2 9.551,48.251 11.1,49.8 27.4,49.8 28.915,51.315 J1.3
  Bottom Layer w0.254: R28.1@63.3,44.6 R28.1@63.527,44.373
  Bottom Layer w0.3: R3.1 7.961,43.649 8.11,43.5 8.5,43.5 8.75,43.25 IC1.3@8.75,42.324 ; IC1.3 8.795,41.105 9.4,40.5 20.1,40.5 ; R8.1@19.6,44.5 19.732,44.368 19.732,43.668 20.1,43.3 IC4.3@20.1,42.4 ; IC4.3 20.09,40.51 20.1,40.5 ; R13.1 30.777,44.223 30.777,43.523 31.1,43.2 IC5.3@31.1,42.5 ; IC5.3 31.135,40.565 31.2,40.5 ; R18.1 41.527,44.223 41.527,43.573 41.9,43.2 IC6.3@41.9,42.4 ; IC6.3 41.885,40.515 41.9,40.5 ; IC7.2 51.615,43.285 51.93,43.6 52.2,43.6 ; R23.1@52.2,44.3 52.2,43.6 ; 52.5,43.6 52.2,43.6 ; 52.527,43.573 52.885,43.215 IC7.3 52.9,42.309 52.9,40.6 ; IC8.2 62.615,43.215 62.9,43.5 63.3,43.5 ; R28.1@63.3,44.1 63.3,43.5 ; IC8.3 63.885,43.315 63.7,43.5 63.3,43.5 ; IC8.3@63.9,42.3 63.9,41 63.4,40.5 41.9,40.5 ; 20.1,40.5 31.2,40.5 ; 31.2,40.5 41.9,40.5
  Bottom Layer w0.35: R3.1 7.961,47.461 8.915,48.415 26.515,48.415 28.9,50.8 J1.3@28.9,53.2
UART_RX: J1.10 R36.1 | length 48.3
  Bottom Layer w0.254: J1.10 36.535,57.235 38.6,59.3 R36.1@82.5,59.3
UART_TX: J1.8 R35.1 | length 52.2
  Bottom Layer w0.254: J1.8 33.995,57.495 36.6,60.1 79.4,60.1 81.3,62 R35.1 R35.1@82.6,62
pads on no net: DRIVER1. DRIVER1.12 DRIVER1.14 DRIVER2. DRIVER2.12 DRIVER2.14 J1.2 J1.4 J1.7 J1.12 J1.16 J1.17 J1.18 J1.19 J1.21 J1.22 J1.23 J1.24 J1.26 J1.27 J1.28 J1.32 J1.35 J1.36 J1.37 J1.38 J1.40

## Polygon pours and split planes (outlines as drawn)
GND on Layer 2 "GND_L03_P000" (solid, pour order 0): 0,0 126,0 126,70.5 0,70.5
+3V3_LDO on Layer 1 "+3V3_LDO_L02_P001" (solid, pour order 1): 0,70.5 126,70.5 126,0 0,0

## Silkscreen, mask and mechanical layers (free items; w line width, h text height)
Top Overlay:
  drawing of 11 lines, arcs and shapes, not listed
  text "GND" at 124.476,62.5 h2 r90
  text "GND" at 91.676,61.8 h2 r90
  text "+12V" at 107.7,61.2 h2 r90
  text "Marko Radolovic / Matej Markovic / Danko Marusic / Korado Korlevic / Visnjan Observatory 2024" at 49.5,58.1 h2.6
  text "Callisto Visnjan / RPi Shield V2.0 / 6 channel current measurement / 2 motor drivers" at 25.1,57.9 h2.8
  text "C1B" at 124.478,57.5 h2 r90
  text "C1A" at 124.478,52.5 h2 r90
  text "C2A" at 124.478,47.5 h2 r90
  text "GND" at 67.5,45.524 h2
  text "C2B" at 124.478,42.5 h2 r90
  text "3V3" at 67.5,40.524 h2
  text "0x76" at 12,39.524 h2
  text "+12V" at 124.5,36.5 h2 r90
  text "MS1" at 73,35.024 h2
  text "MS2" at 79,35.024 h2
  text "CH1" at 6.5,28.022 h2
  text "CH2" at 16.5,28.022 h2
  text "CH3" at 27,28.024 h2
  text "CH4" at 37,28.022 h2
  text "CH5" at 47,28.024 h2
  text "CH6" at 56.5,28.024 h2
  text "GND" at 124.476,27.5 h2 r90
  text "0x40" at 6.5,26.524 h2
  text "0x41" at 16.5,26.524 h2
  text "0x44" at 27,26.524 h2
  text "0x45" at 37,26.524 h2
  text "0x46" at 47,26.524 h2
  text "0x42" at 56.5,26.524 h2
  text "MS1 MS2    uSTEP / 3V3  GND    2 / GND 3V3     4 / GND GND   8 / 3V3   3V3    16" at 68,26 h2
  text "MS1" at 73,23.524 h2
  text "MS2" at 78.5,23.524 h2
  text "C1B" at 124.478,22.5 h2 r90
  text "GND" at 67.9,17.524 h2
  text "C1A" at 124.478,17.5 h2 r90
  text "C2A" at 124.478,12.5 h2 r90
  text "3V3" at 67.8,12.424 h2
  text "V+" at 5,9.5 h2
  text "V-" at 10,9.5 h2
  text "V+" at 15.5,9.5 h2
  text "V-" at 20.5,9.5 h2
  text "V+" at 25,9.5 h2
  text "V-" at 30.5,9.5 h2
  text "V+" at 35,9.5 h2
  text "V-" at 40.5,9.5 h2
  text "V+" at 45.5,9.5 h2
  text "V-" at 50.5,9.5 h2
  text "V+" at 55.5,9.5 h2
  text "V-" at 60.5,9.5 h2
  text "C2B" at 124.478,7.5 h2 r90
  text "+12V" at 124.5,2 h2 r90
Mechanical 1:
  lines w0.254: 21.5,54.5 79.5,54.5 ; 50.5,52 50.5,57
M2: Outline:
  lines w0.254: 0,3 ccw(c3,3) 3,0 123,0 ccw(c123,3) 126,3 126,67.5 ccw(c123,67.5) 123,70.5 3,70.5 ccw(c3,67.5) 0,67.5 0,3